# Altium PCB WX0.012.600PCB.PcbDoc
Units mil, origin at the board's own origin, x right, y up, seen from the top; angles counter-clockwise.
Board outline 3758 x 2637.8 mil, 2 copper layers (Top Layer, Bottom Layer), stack 12.8 mil thick; 32 components, 31 nets, 81 pads, 140 vias.
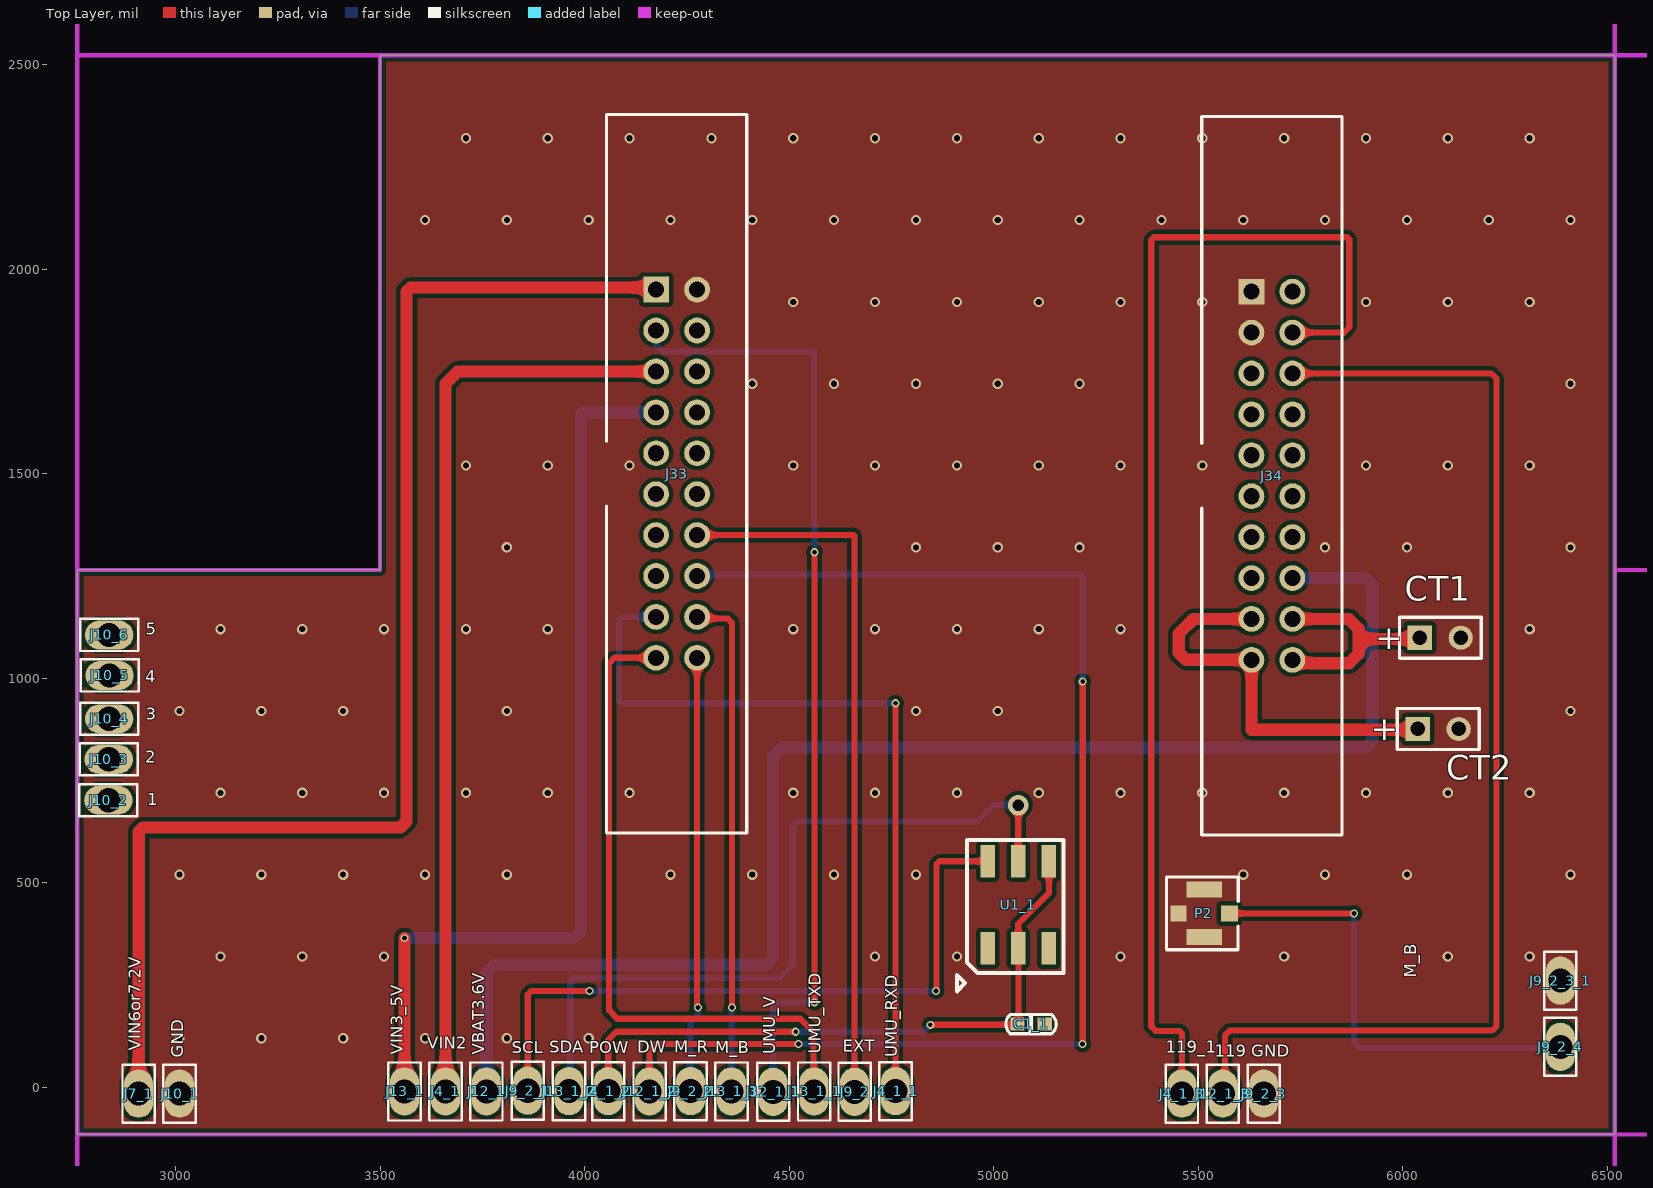
[diagram p0: Top Layer view]
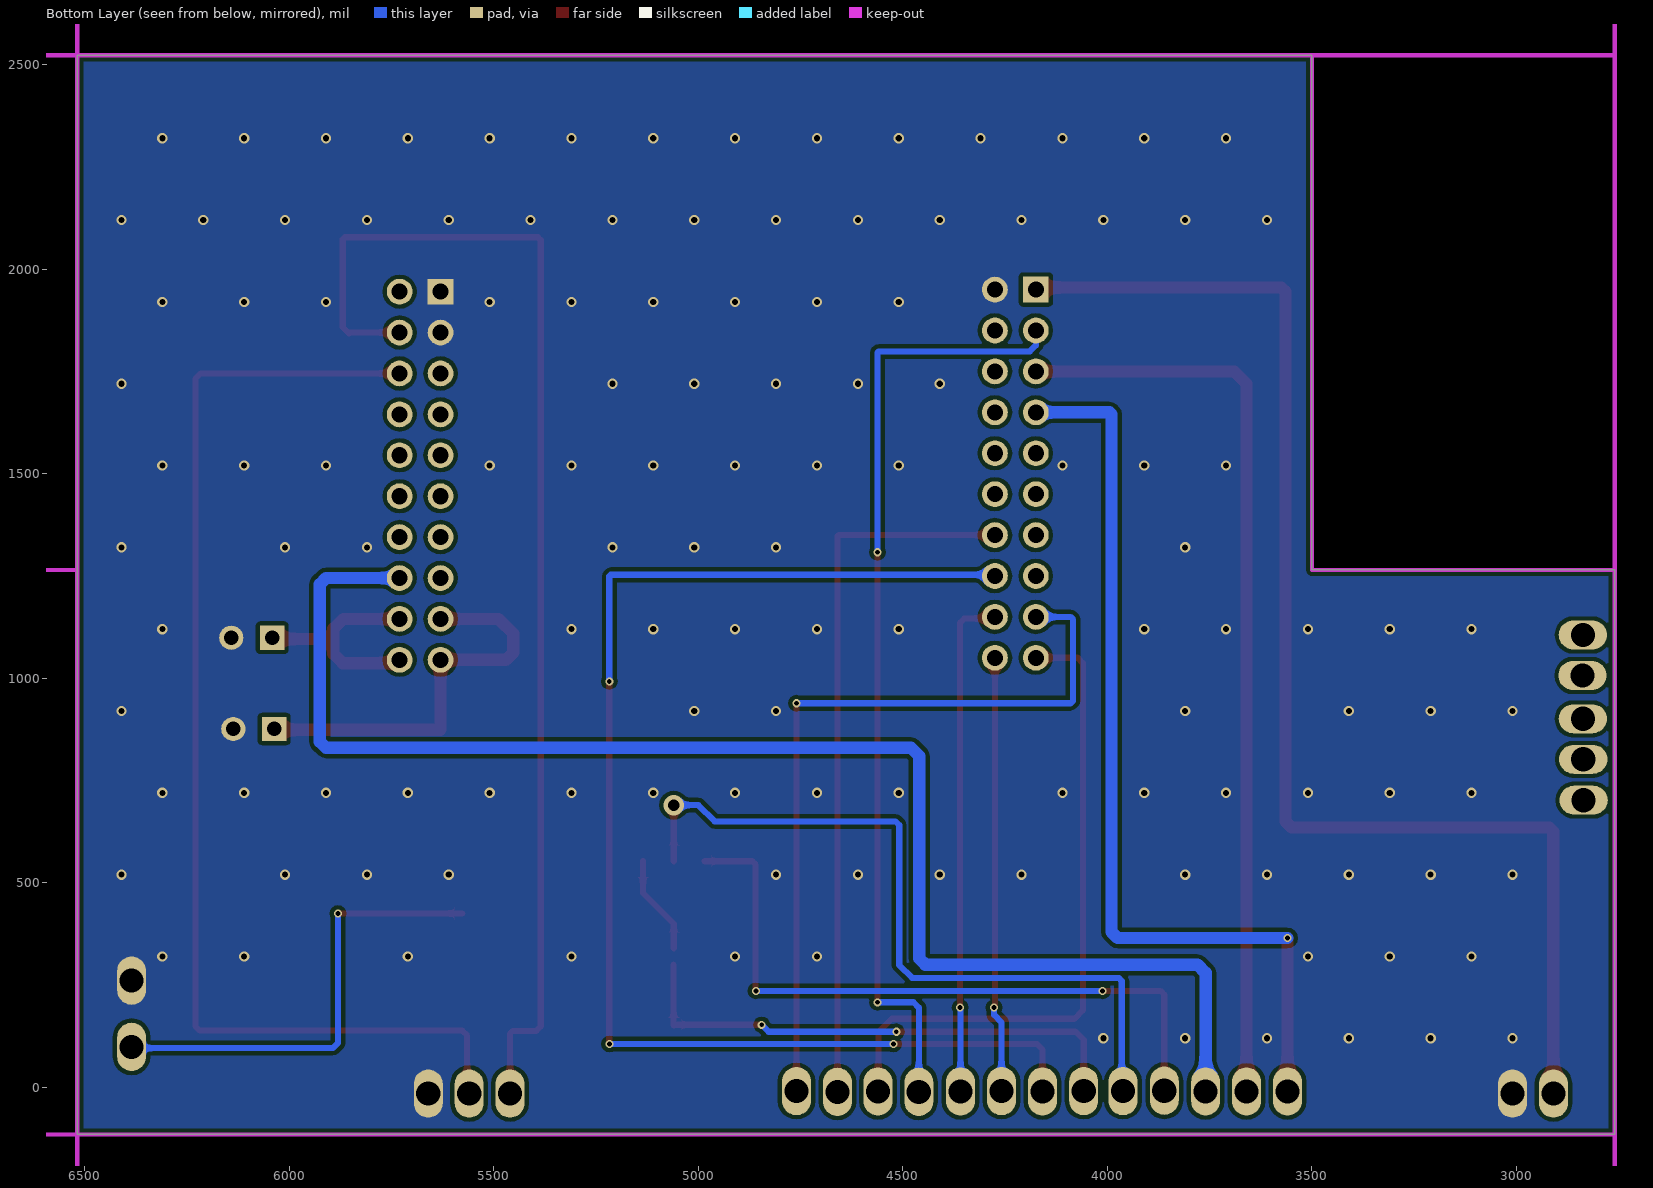
[diagram p1: Bottom Layer view, seen from below]

## Layer stack, top to bottom
Top Solder: solder mask 0.4, Solder Resist, Dk 3.5
Top Layer: signal copper 1.4
Dielectric 1: core 10, FR-4, Dk 4.2
Bottom Layer: signal copper 1.4
Bottom Solder: solder mask 0.4, Solder Resist, Dk 3.5

## Board outline
2760,-115 2760,1265 3500,1265 3500,2522.8 6518,2522.8 6518,-115

## Design rules (kind name [scope] priority, off if disabled: settings)
Clearance [All] p1: gap=10 ignorepadtopadclearanceinfootprint=FALSE except(0: Arc-Hole Track-Hole SMDPad-Hole THPad-Hole Via-Hole Fill-Hole Poly-Hole Region-Hole Text-Hole)
PlaneConnect [All] p1: planeconnectstyle=Direct reliefexpansion=20 reliefentries=4 reliefconductorwidth=10 reliefairgap=10
PolygonConnect [All] p1: connectstyle=Direct reliefconductorwidth=10 reliefentries=4 polygonreliefangle="90 Angle" airgapwidth=10
RoutingVias [All] p1: holewidth=11.81 width=19.68 viastyle="Through Hole" minholewidth=11.81 minwidth=19.68 maxholewidth=28 maxwidth=50
SilkToSilkClearance [All] p1: silktosilkclearance=0
SilkToSolderMaskClearance [IsPad] p1: minsilkscreentomaskgap=0 clearancetoexposedcopper=TRUE
SolderMaskExpansion [All] p1: expansion=4
Width [All] p1: maxlimit=30 minlimit=10 preferedwidth=10
27 further rules are at their usual default settings.

## Components (designator, comment, footprint, x,y, rotation, side; value= is the part's Value field where it differs from the comment)
C1_1 "100N/50V" CAP0603 5058.49,155 r0 top (schematic designator C1)
CT1 "BAT" BAT2 6092,1099 r0 top
CT2 "BAT" BAT2 6087,876 r0 top
J4_1 "1Pin" 顶针孔1 3660,-10 r0 top (schematic designator J4)
J4_1_1 "1Pin" 顶针孔1 4760,-9 r0 top (schematic designator J4)
J4_1_2 "1Pin" 顶针孔1 4058,-9 r0 top (schematic designator J4)
J4_1_3 "1Pin" 顶针孔1 5460,-15 r0 top (schematic designator J4)
J7_1 "1Pin" 顶针孔1 2910,-15 r0 top (schematic designator J7)
J9_2 "1Pin" 顶针孔1 4660,-11 r0 top (schematic designator J9)
J9_2_1 "1Pin" 顶针孔1 3861,-8 r0 top (schematic designator J9)
J9_2_2 "1Pin" 顶针孔1 4259,-9 r0 top (schematic designator J9)
J9_2_3 "1Pin" 顶针孔1 5660,-15 r0 top (schematic designator J9)
J9_2_3_1 "1Pin" 顶针孔1 6385,261 r0 top (schematic designator J9)
J9_2_4 "1Pin" 顶针孔1 6385,99 r0 top (schematic designator J9)
J10_1 "1Pin" 顶针孔1 3010,-15 r0 top (schematic designator J10)
J10_2 "1Pin" 顶针孔1 2836,702 r270 top (schematic designator J10)
J10_3 "1Pin" 顶针孔1 2837,802 r270 top (schematic designator J10)
J10_4 "1Pin" 顶针孔1 2838,901 r270 top (schematic designator J10)
J10_5 "1Pin" 顶针孔1 2839,1007 r270 top (schematic designator J10)
J10_6 "1Pin" 顶针孔1 2838,1106 r270 top (schematic designator J10)
J12_1 "1Pin" 顶针孔1 3760,-10 r0 top (schematic designator J12)
J12_1_1 "1Pin" 顶针孔1 4461,-11 r0 top (schematic designator J12)
J12_1_2 "1Pin" 顶针孔1 4159,-10 r0 top (schematic designator J12)
J12_1_3 "1Pin" 顶针孔1 5560,-15 r0 top (schematic designator J12)
J13_1 "1Pin" 顶针孔1 3560,-10 r0 top (schematic designator J13)
J13_1_1 "1Pin" 顶针孔1 4561,-10 r0 top (schematic designator J13)
J13_1_2 "1Pin" 顶针孔1 3962,-9 r0 top (schematic designator J13)
J13_1_3 "1Pin" 顶针孔1 4359,-10 r0 top (schematic designator J13)
J33 "20Pin" DC254_2*10 4225,1500 r0 top
J34 "20Pin" DC254_2*10 5680,1495 r0 top
P2 "IPEX" ANT-IPEX 5576.02,425.21 r90 top (schematic designator P1)
U1_1 "HP6862I" HP6862 5060,446.3 r0 top (schematic designator U1)

## Footprints (in the part's own frame and the unit in brackets; to place one, negate y for a bottom-side part, rotate by r counter-clockwise, add the part's x,y. Pads: shape width x height; smd on the part's side, far side on the other; paste and mask are expansions set on the pad)
ANT-IPEX [mm] "IPX天线座"
  rect 1x1.05 smd: 1(0,0)
  rect 1x2.2 smd: 2(-1.475,1.55) 2(1.475,1.55)
  rect 1x1 smd: 2(0,3.151)
  silkscreen extent -2.26,-0.56 2.26,3.9
BAT2 [mm]
  rect 1.5x1.5 hole 0.9: 1(-1.282,0.001)
  round 1.5 hole 0.9: 2(1.258,0.001)
  silkscreen extent -2.55,-1.27 2.53,1.27
CAP0603 [mil]
  rect 35x31 smd: 1(-0.49,0) 2(66.51,0)
  silkscreen extent -29,-24 94,23, body extent 1,-15 72,15, height 20
DC254_2*10 [mm]
  rect 1.6x1.6 hole 1: 1(-1.27,11.43)
  round 1.6 hole 1: 2(1.27,11.43) 3(-1.27,8.89) 4(1.27,8.89) 5(-1.27,6.35) 6(1.27,6.35) 7(-1.27,3.81) 8(1.27,3.81) 9(-1.27,1.27) 10(1.27,1.27) 11(-1.27,-1.27) 12(1.27,-1.27) 13(-1.27,-3.81) 14(1.27,-3.81) 15(-1.27,-6.35) 16(1.27,-6.35) 17(-1.27,-8.89) 18(1.27,-8.89) 19(-1.27,-11.43) 20(1.27,-11.43)
  silkscreen extent -4.35,-22.3 4.35,22.3
HP6862 [mm]
  rect 0.9x2 smd: 1(-1.9,-2.7) 2(0,-2.7) 3(1.9,-2.7) 4(1.9,2.7) 5(0,2.7) 6(-1.9,2.7)
  silkscreen extent -3.8,-5.37 2.8,4.03
顶针孔1 [mm]
  oval 1.8x3 hole 1.5: 1(0,0)
  silkscreen extent -1,-1.8 1,1.8

## Part data
C1_1: "100N/50V，±10%，0603", Part Name=0603贴片电容, Part Number=101020103-0021, ID=34
CT1 CT2: "电池"
J33 J34: library part 1010902-0139, "DC2 2.54mm 2x10pin,2.54mm间距，2x10pin，32×8.55×27.5mm,母头,双排,双排牛角座", Part Name=DC牛角座, ID=4, Part Number=1010902-0139, SMD/DIP=DIP

## Via types
v1: diameter 25, hole 15, Top Layer to Bottom Layer, tented both sides, 125 vias
v2: diameter 19.68, hole 11.81, Top Layer to Bottom Layer, tented both sides, 14 vias
v3: diameter 50, hole 28, Top Layer to Bottom Layer, tented both sides, 1 vias

## Nets (pads, with @x,y where several pads share a name; then routed paths per layer and width w, separated by ;. In a path a pad name is that pad's centre, name@x,y a point inside that pad or via, vN(x,y) a via of type N, cw(c..) or ccw(c..) an arc to the next point about the centre after c; other vN are vias at no path point)
12V: CT2.1 J34.17 J34.19 | length 1002.8
  Top Layer w30: J34.17 5488,1145 5452,1109 5452,1063 5470,1045 J34.19 5630,874 6034.48,874 CT2.1
12V_1: CT1.1 J34.18 J34.20 | length 558.6
  Top Layer w30: J34.20 5738,1037 5869,1037 5892,1060 5892,1096 ; J34.18 5868,1145 5892,1121 5892,1096 ; CT1.1 6038.48,1096 5892,1096
119: J12_1_3.1 J34.6 | length 2896.9
  Top Layer w15: J12_1_3.1@5565,-10 5565,127 5577,139 6218,139 6229,150 6229,1732 6216,1745 J34.6
119_1: J4_1_3.1 J34.4 | length 3001.1
  Top Layer w15: J4_1_3.1 5460,132 5454,138 5396,138 5385,149 5385,2071 5392,2078 5864,2078 5869,2073 5869,1858 5854,1843 5852,1845 J34.4
AD1: J12_1_1.1 J33.3 | length 2330.8
  Top Layer w15: v2(4562,208) v2(4562,1308)
  Bottom Layer w15: J33.3 4175,1814 4190,1799 4559,1799 4562,1796 v2(4562,1308) ; J12_1_1.1 4461,195 4474,208 v2(4562,208)
AD2: J4_1.1 J33.5 | length 2257.4
  Top Layer w30: J4_1.1 3660,1720 3690,1750 J33.5
AD3: J13_1.1 J33.7 | length 2263.3
  Top Layer w30: J13_1.1 v2(3560,365)
  Bottom Layer w30: v2(3560,365) 3975,365 3990,380 3990,1645 3995,1650 J33.7
DW: J12_1_2.1 J33.16 | length 3255.3
  Top Layer w15: J12_1_2.1 4159,93 4172,106 v2(4523,106) ; v2(5217,106) 5217.5,106.5 v2(5217.5,992.5)
  Bottom Layer w15: J33.16 4278,1253 5214,1253 5217.5,1249.5 v2(5217.5,992.5) ; v2(4523,106) v2(5217,106)
GND: CT1.2 CT2.2 J9_2_3.1 J9_2_3_1.1 J10_1.1 J33.2 J34.1 J34.3 P2.2
  other v1: 3010,120 3210,120 3410,120 3610,120 3810,120 4010,120 3110,320 3310,320 3510,320 4710,320 4910,320 5310,320 5710,320 6110,320 6310,320 3010,520 3210,520 3410,520 3610,520 3810,520 4210,520 4410,520 4610,520 4810,520 5610,520 5810,520 6010,520 6410,520 3110,720 3310,720 3510,720 3710,720 3910,720 4110,720 4510,720 4710,720 4910,720 5110,720 5310,720 5510,720 5710,720 5910,720 6110,720 6310,720 3010,920 3210,920 3410,920 3810,920 4810,920 5010,920 6410,920 3110,1120 3310,1120 3510,1120 3710,1120 3910,1120 4510,1120 4710,1120 4910,1120 5110,1120 5310,1120 6310,1120 3810,1320 4810,1320 5010,1320 5210,1320 5810,1320 6010,1320 6410,1320 3710,1520 3910,1520 4110,1520 4510,1520 4710,1520 4910,1520 5110,1520 5310,1520 5510,1520 5910,1520 6110,1520 6310,1520 4410,1720 4610,1720 4810,1720 5010,1720 5210,1720 6410,1720 4510,1920 4710,1920 4910,1920 5110,1920 5310,1920 5510,1920 5910,1920 6110,1920 6310,1920 3610,2120 3810,2120 4010,2120 4210,2120 4410,2120 4610,2120 4810,2120 5010,2120 5210,2120 5410,2120 5610,2120 5810,2120 6010,2120 6210,2120 6410,2120 3710,2320 3910,2320 4110,2320 4310,2320 4510,2320 4710,2320 4910,2320 5110,2320 5310,2320 5510,2320 5710,2320 5910,2320 6110,2320 6310,2320
HIC_EXT: J9_2.1 J33.14 | length 1744.2
  Top Layer w15: J33.14 4657,1350 4660,1347 J9_2.1
HIC_RXD: 
HIC_TXD: 
M_B: J13_1_3.1 J33.18 | length 1237.2
  Top Layer w15: J33.18 4279,1146 4350,1146 4360,1136 v2(4360,195)
  Bottom Layer w15: J13_1_3.1 4359,194 v2(4360,195)
M_R: J9_2_2.1 J33.20 | length 1074.4
  Top Layer w15: J33.20 4275,197 v2(4277,195)
  Bottom Layer w15: J9_2_2.1 4259,159 4277,177 v2(4277,195) ; J33.20 J33.20@4280,1045
NetC1_1: 
NetJ1_1: 
NetJ3_1: 
NetJ6_1: 
POW: C1_1.1 J4_1_2.1 U1_1.2 U1_1.4 | length 1535.2
  Top Layer w15: J4_1_2.1 4058,116 4078,136 v2(4516,136) ; v2(4845,153) 5058.57,153 5060,151.57 5060.2,151.77 5060.2,300 ; U1_1.2 5060,400 5135,475 5135,552.4 U1_1.4
  Bottom Layer w15: v2(4516,136) 4828,136 v2(4845,153)
SCL: J9_2_1.1 U1_1.6 | length 1668.5
  Top Layer w15: J9_2_1.1 3861,227 3870,236 v2(4012,236) ; v2(4859,236) 4860,237 4860,545 4867.6,552.6 U1_1.6
  Bottom Layer w15: v2(4012,236) v2@4853,236
SDA: J13_1_2.1 U1_1.5 | length 1881.1
  Top Layer w15: U1_1.5 v3(5060,690)
  Bottom Layer w15: J13_1_2.1 3965,-6 3965,260 3972.5,267.5 4477.5,267.5 4509,299 4509,641 4518,650 4960,650 5000,690 v3(5060,690)
TIANXIAN: J9_2_4.1 P2.1 | length 1132.3
  Top Layer w15: P2.1 v2(5880.79,425.21)
  Bottom Layer w15: v2(5880.79,425.21) 5880.79,108.21 5893,96 6382,96 J9_2_4.1
UMU_RX: J4_1_1.1 J33.17 | length 1919
  Top Layer w15: J4_1_1.1 v2(4760,939)
  Bottom Layer w15: J33.17 4090,1150 4084,1144 4084,945 4090,939 v2(4760,939)
UMU_TX: J13_1_1.1 J33.19 | length 1641.3
  Top Layer w15: J33.19 4073,1050 4060,1037 4060,188 4080.34,167.66 4527.34,167.66 4560,135 J13_1_1.1@4560,-15
VCC: 
VIN: 
VIN2: 
VIN3: 
VIN3.6V: J12_1.1 J34.16 | length 3565.2
  Bottom Layer w30: J12_1.1 3760,280 3780,300 4445,300 4460,315 4460,810 4480,830 5910,830 5925,845 5925,1230 5910,1245 J34.16
VIN6V: J7_1.1 J33.1 | length 3216.6
  Top Layer w30: J7_1.1 2910,625 2920,635 3550,635 3565,650 3565,1945 3575,1955 4170,1955 J33.1
VNB: 
pads on no net: C1_1.2 J10_2.1 J10_3.1 J10_4.1 J10_5.1 J10_6.1 J33.4 J33.6 J33.8 J33.9 J33.10 J33.11 J33.12 J33.13 J33.15 J34.2 J34.5 J34.7 J34.8 J34.9 J34.10 J34.11 J34.12 J34.13 J34.14 J34.15 U1_1.1 U1_1.3

## Polygon pours and split planes (outlines as drawn)
GND on Top Layer "Top Layer-No Net" (solid, remove dead copper, pour order 24): 2760,-115 2760,1265 3500,1265 3500,2522.8 6518,2522.8 6518,-115
GND on Bottom Layer "Top Layer-No Net1" (solid, remove dead copper, pour order 25): 2760,-115 2760,1265 3500,1265 3500,2522.8 6518,2522.8 6518,-115

## Keep-outs
Keep-Out Layer:
  lines w10: 2760,-115 2760,-233.11 6315,-233.11 6518,-233.11 ; 2760,-115 2760,1265 ; 2760,-115 6315,-115 6518,-115 ; 2760,1265 2760,2522.8 ; 2760,1265 3500,1265 3500,2522.8 ; 2760,2522.8 3500,2522.8 ; 2760,2522.8 6315,2522.8 6518,2522.8 ; 2760,2522.8 2760,3902.8 ; 2760,3902.8 3500,3902.8 3500,5160.59 ; 2760,3902.8 2760,5160.59 ; 2760,5160.59 3500,5160.59 ; 2760,5160.59 2760,5278.7 2963,5278.7 6518,5278.7 ; 3500,2522.8 6518,2522.8 ; 3500,5160.59 6518,5160.59 ; 6518,-233.11 6518,-115 ; 6518,-233.11 6518,-115 ; 6518,-233.11 10073,-233.11 10276,-233.11 10276,-115 ; 6518,-115 6518,145 6518,2522.8 ; 6518,-115 10073,-115 10276,-115 ; 6518,-115 6518,1265 ; 6518,1265 7258,1265 7258,2522.8 ; 6518,1265 6518,2522.8 ; 6518,2522.8 7258,2522.8 ; 6518,2522.8 6518,3902.8 ; 6518,2522.8 6518,2782.8 6518,5160.59 ; 6518,2522.8 10073,2522.8 10276,2522.8 ; 6518,2522.8 6518,3902.8 ; 6518,3902.8 6518,5160.59 ; 6518,3902.8 7258,3902.8 7258,5160.59 ; 6518,3902.8 6518,5160.59 ; 6518,5160.59 7258,5160.59 ; 6518,5160.59 6518,5278.7 ; 6518,5278.7 6721,5278.7 10276,5278.7 10276,5160.59 ; 7258,2522.8 10276,2522.8 ; 7258,5160.59 10276,5160.59 ; 10276,-115 10276,145 10276,2522.8 ; 10276,2522.8 10276,3902.8 10276,5160.59 ; 10276,2522.8 10276,2782.8 10276,5160.59

## Silkscreen, mask and mechanical layers (free items; w line width, h text height)
Top Overlay:
  text "5" at 2927,1096 h50
  text "4" at 2926,980 h50
  text "3" at 2928,889 h50
  text "2" at 2926,784 h50
  text "1" at 2931,680 h50
  text "M_B" at 6042.41,268.41 h50 r90
  text "VIN6or7.2V" at 2925,90 h50 r90
  text "VIN2" at 3615,85 h50
  text "UMU_TXD" at 4587,82 h50 r90
  text "UMU_V" at 4476,81 h50 r90
  text "VIN3_5V" at 3565,80 h50 r90
  text "VBAT3.6V" at 3765,80 h50 r90
  text "EXT" at 4631,77 h50
  text "SDA" at 3914,75 h50
  text "DW" at 4129,75 h50
  text "M_R" at 4219,75 h50
  text "119_1" at 5420,75 h50
  text "SCL" at 3822,74 h50
  text "POW" at 4011,74 h50
  text "M_B" at 4320,74 h50
  text "UMU_RXD" at 4774,74 h50 r90
  text "GND" at 3029,72 h50 r90
  text "119" at 5540,65 h50
  text "GND" at 5630,65 h50

## Text inside footprints (layer, text, board x,y; h text height)
CT1: Top Overlay "+" at 5932,1071 h59.06
CT2: Top Overlay "+" at 5922,849 h59.06